# Altium PCB CoreSTM32MP157.PcbDoc
Units mil, origin at the board's own origin, x right, y up, seen from the top; angles counter-clockwise.
Board outline 2263.78 x 1771.65 mil, 2 copper layers (Top Layer, Bottom Layer); 44 components, 97 nets, 1096 pads, 0 vias.
Unrouted connection lines stored in the file: 340.
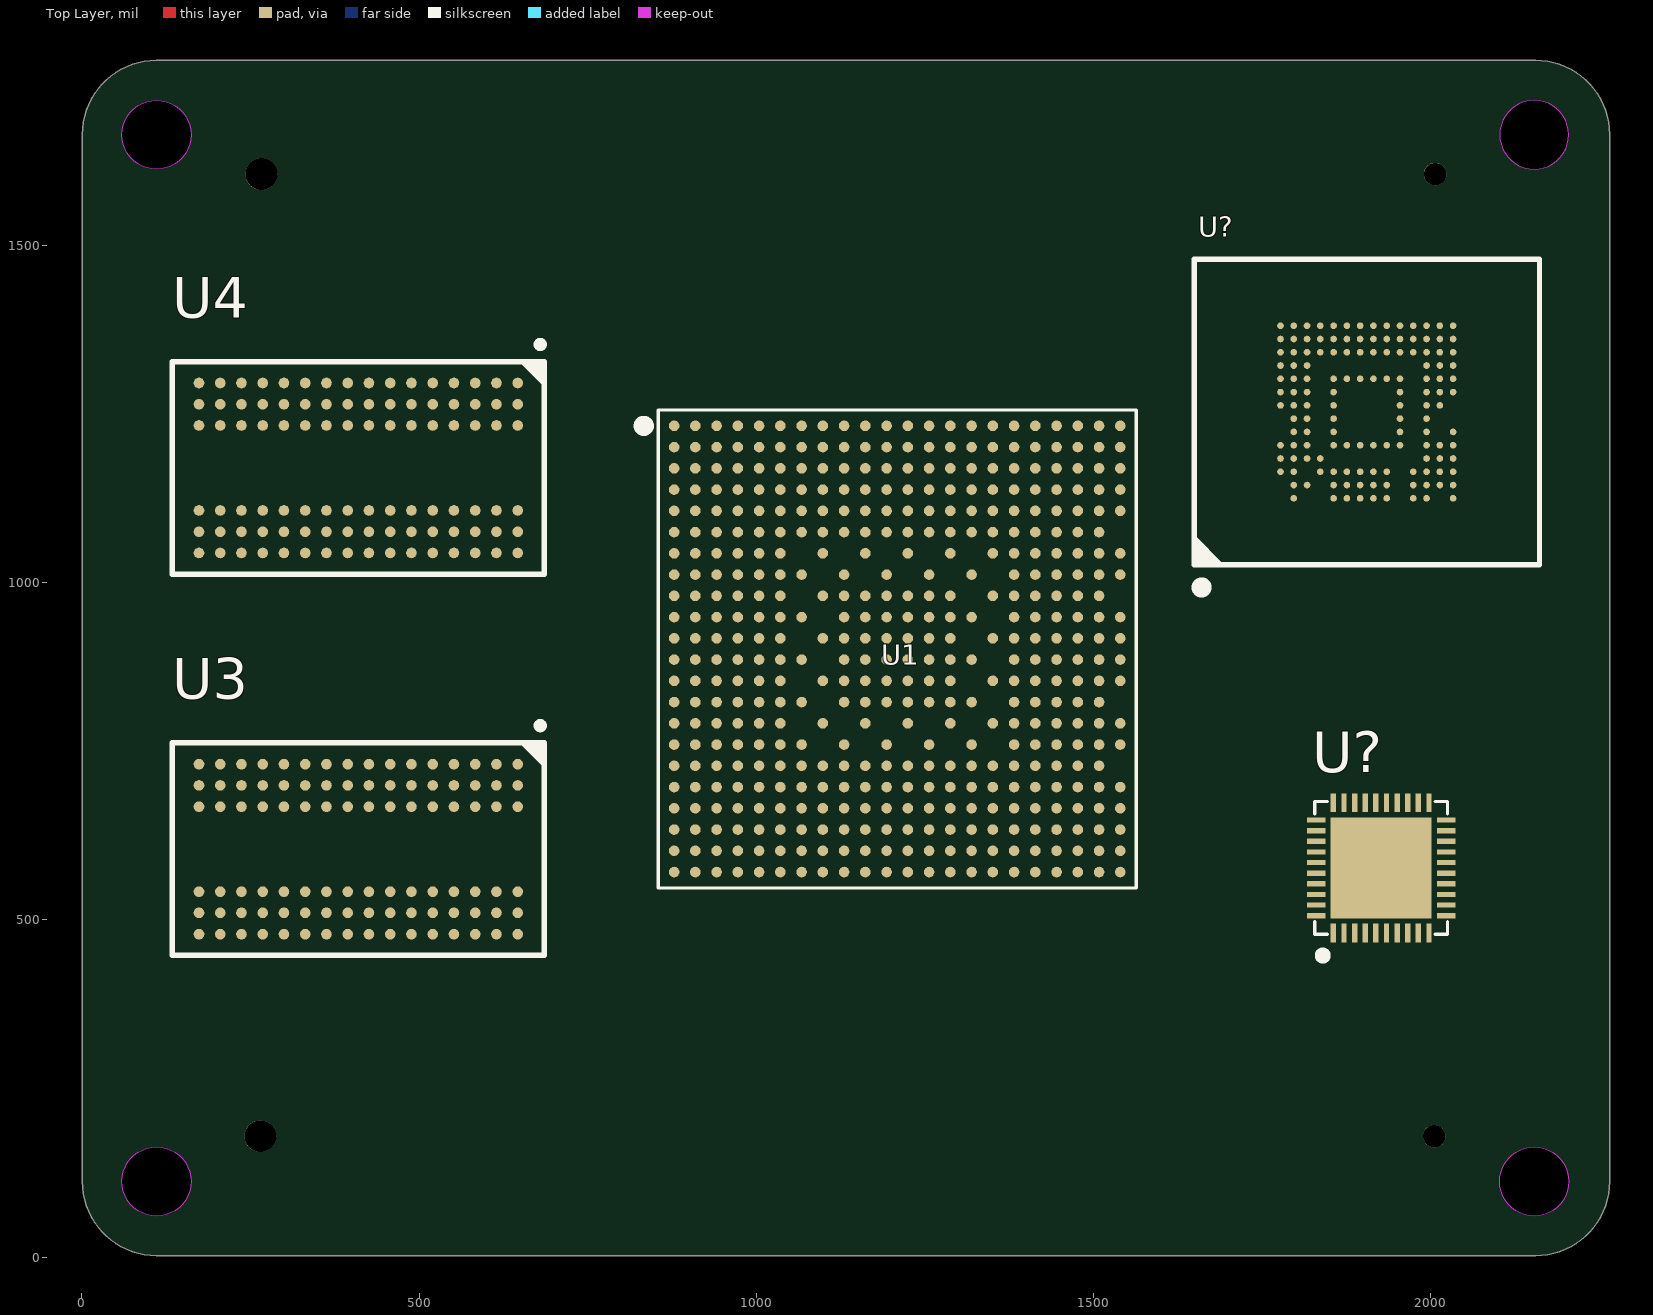
[diagram p0: Top Layer view]
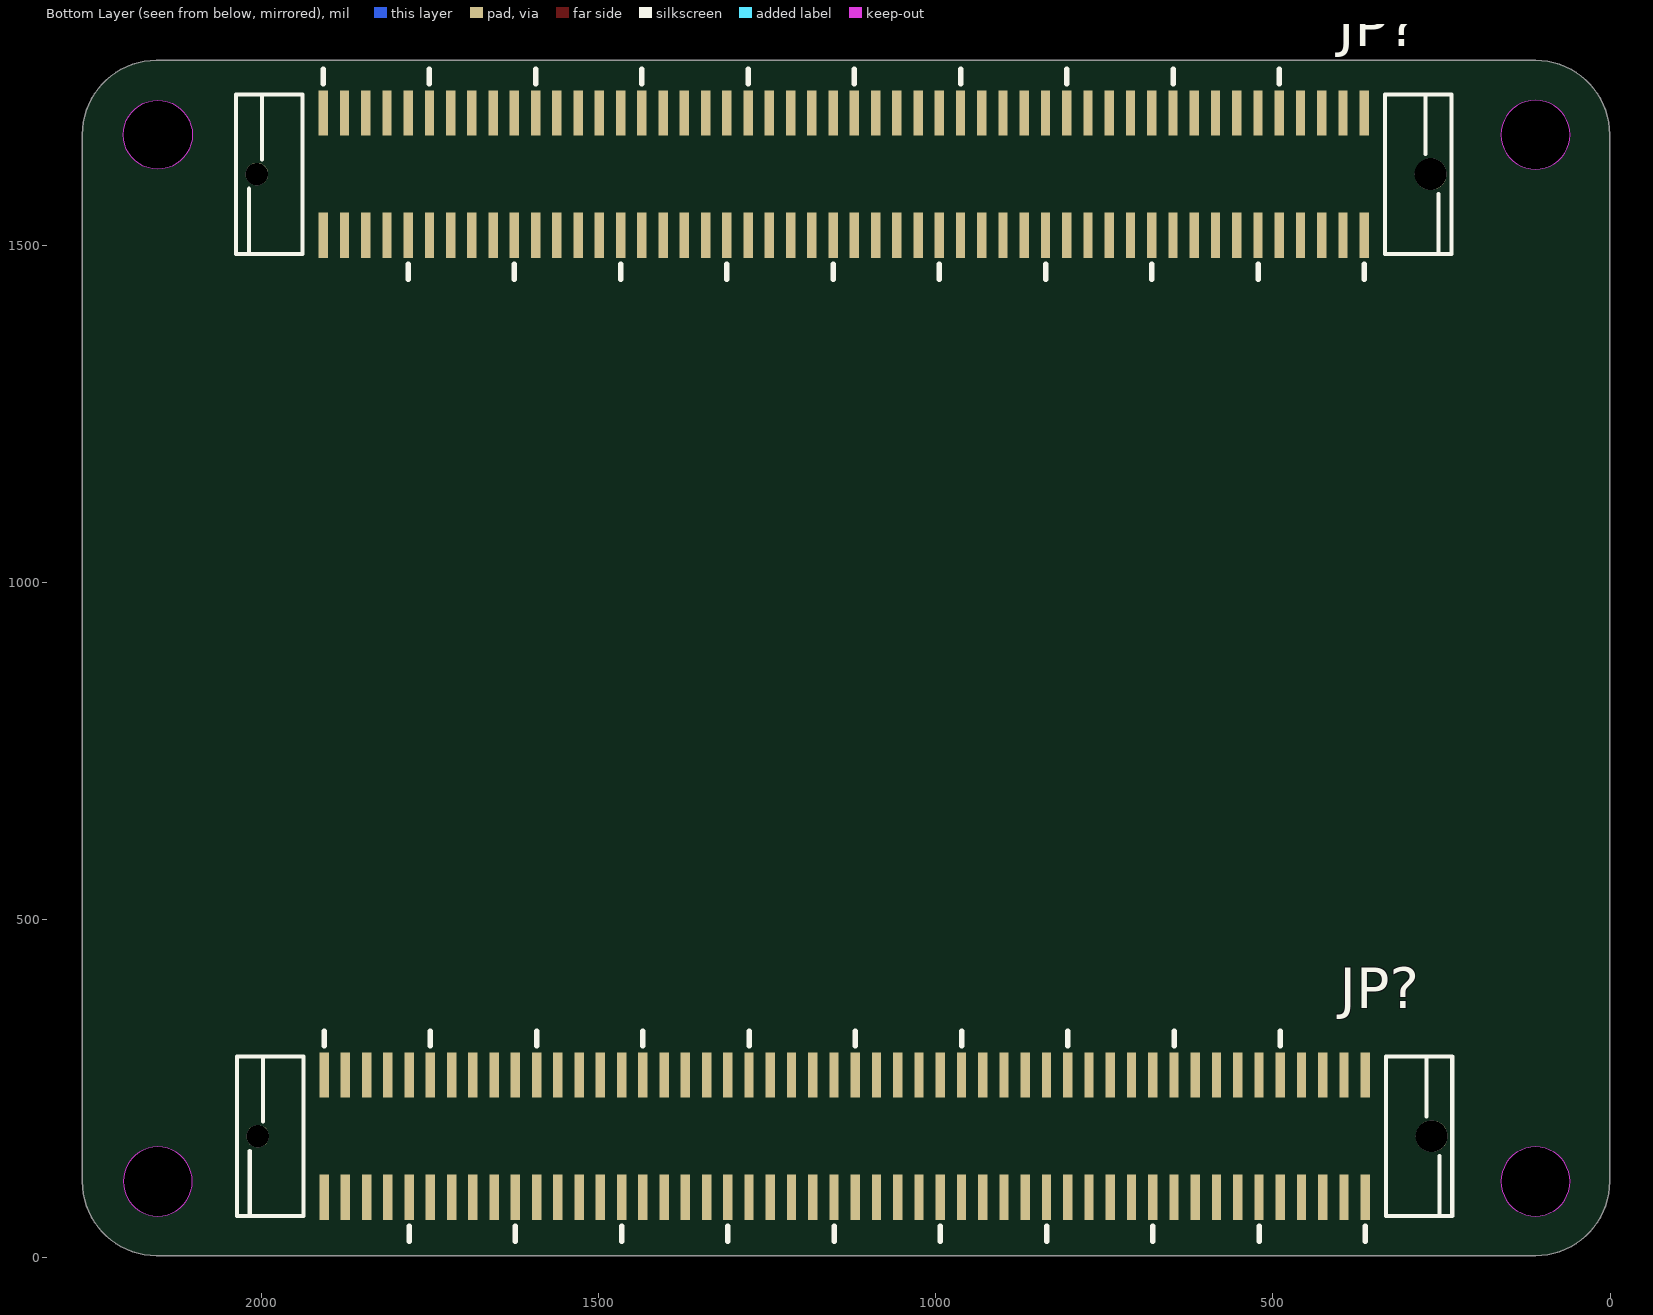
[diagram p1: Bottom Layer view, seen from below]

## Layer stack, top to bottom
Top Solder: solder mask 0.4, Solder Resist, Dk 3.5
Top Layer: signal copper 1.4
Dielectric 1: dielectric 12.6, FR-4, Dk 4.8
Bottom Layer: signal copper 1.4
Bottom Solder: solder mask 0.4, Solder Resist, Dk 3.5

## Board outline
0.97,112.34 0.97,1664.31 cw(c110.81,1664.31) 110.81,1774.15 2154.91,1774.15 cw(c2154.91,1664.31) 2264.75,1664.31 2264.75,112.34 cw(c2154.91,112.34) 2154.91,2.5 110.81,2.5 cw(c110.81,112.34)
cut-out: 2204.12,112.34 cw(c2152.94,112.34) 2152.94,61.16 cw(c2152.94,112.34) 2101.76,112.34 cw(c2152.94,112.34) 2152.94,163.52 cw(c2152.94,112.34)
cut-out: 2152.94,1612.74 ccw(c2152.94,1663.92) 2204.12,1663.92 ccw(c2152.94,1663.92) 2152.94,1715.1 ccw(c2152.94,1663.92) 2101.76,1663.92 ccw(c2152.94,1663.92)
cut-out: 161.99,1663.92 cw(c110.81,1663.92) 110.81,1612.74 cw(c110.81,1663.92) 59.63,1663.92 cw(c110.81,1663.92) 110.81,1715.1 cw(c110.81,1663.92)
cut-out: 161.99,112.34 cw(c110.81,112.34) 110.81,61.16 cw(c110.81,112.34) 59.63,112.34 cw(c110.81,112.34) 110.81,163.52 cw(c110.81,112.34)

## Design rules (kind name [scope] priority, off if disabled: settings)
Clearance [All] p1: gap=10 ignorepadtopadclearanceinfootprint=FALSE except(0: Arc-Hole Track-Hole SMDPad-Hole THPad-Hole Via-Hole Fill-Hole Poly-Hole Region-Hole Text-Hole)
PolygonConnect [All] p1: connectstyle=Relief reliefconductorwidth=10 reliefentries=4 polygonreliefangle="90 Angle" airgapwidth=10
RoutingVias [All] p1: holewidth=28 width=50 viastyle="Through Hole" minholewidth=28 minwidth=50 maxholewidth=28 maxwidth=50
SolderMaskExpansion [All] p1: expansion=4 istentingtop=FALSE
Width [All] p1: maxlimit=10 minlimit=10 preferedwidth=10
30 further rules are at their usual default settings.

## Classes and differential pairs
component class PHY: U?
component class BTB: JP?
component class EMMC: C103 C104 C? R? U?
component class DDR: C45 C46 C47 C48 C49 C50 C51 C52 C53 C54 C55 C56 C57 C58 C59 C60 C61 C62 C63 C64 C65 C66 C67 C68 R14 R15 R18 R27 R30 U3 U4
component class CPU_CORE1: U1

## Components (designator, comment, footprint, x,y, rotation, side; value= is the part's Value field where it differs from the comment)
C45 "100nF" "C 0402" 12780,3580 r90 top
C46 "100nF" "C 0402" 13010,3580 r90 top
C47 "100nF" "C 0402" 12320,3580 r90 top
C48 "100nF" "C 0402" 12550,3580 r90 top
C49 "10uF" "C 0603" 10270,3560 r90 top
C50 "1uF" "C 0402" 10495,3580 r90 top
C51 "1uF" "C 0402" 10730,3580 r90 top
C52 "100nF" "C 0402" 10940,3580 r90 top
C53 "100nF" "C 0402" 11170,3580 r90 top
C54 "100nF" "C 0402" 11400,3580 r90 top
C55 "100nF" "C 0402" 11630,3580 r90 top
C56 "100nF" "C 0402" 11860,3580 r90 top
C57 "100nF" "C 0402" 12090,3580 r90 top
C58 "10uF" "C 0603" 8220,3560 r90 top
C59 "1uF" "C 0402" 8445,3580 r90 top
C60 "1uF" "C 0402" 8675,3580 r90 top
C61 "100nF" "C 0402" 8905,3580 r90 top
C62 "100nF" "C 0402" 9115,3580 r90 top
C63 "100nF" "C 0402" 9345,3580 r90 top
C64 "100nF" "C 0402" 9575,3580 r90 top
C65 "100nF" "C 0402" 9805,3580 r90 top
C66 "100nF" "C 0402" 10035,3580 r90 top
C67 "0.1uF" "C 0402" 7750,3580 r90 top
C68 "0.1uF" "C 0402" 7070,3580 r90 top
C103 "1uF" "C 0603" 7695,3830 r90 top
C103 "10uF" "C 0603" 8535,3830 r90 top
C103 "10uF" "C 0603" 7975,3830 r90 top
C104 "100nF" "C 0402" 8810,3850 r90 top
C104 "100nF" "C 0402" 8250,3850 r90 top
C104 "100nF" "C 0402" 7410,3850 r90 top
C? "10uF" "C 0402" 7090,3865 r0 top
JP? "3710F_2*50" 3710F_2*50 1134.76,179.45 r90 bottom
JP? "3710F_2*50" 3710F_2*50 1136.22,1605.55 r90 bottom
R14 "240R" "R 0402" 13465,3580 r90 top
R15 "240R" "R 0402" 13240,3580 r90 top
R18 "100R" "R 0402" 7530,3580 r90 top
R27 "1K" "R 0402" 7980,3580 r90 top
R30 "1K" "R 0402" 7300,3580 r90 top
R? "10K" "R 0402" 7260,3865 r0 top
U1 "STM32MP175DAA1" LFBGA448 878.07,1232.44 r0 top
U3 "NT5CC256M16EP-EKI" BGA96 410,605 r270 top
U4 "NT5CC256M16EP-EKI" BGA96 410,1170 r270 top
U? "YT8511C/H" "QFN40 5X5_N" 1926.15,577.21 r0 top
U? "KLM8G1GETF-B041" "BGA153  EMMC" 1904.84,1252.95 r90 top

## Footprints (in the part's own frame and the unit in brackets; to place one, negate y for a bottom-side part, rotate by r counter-clockwise, add the part's x,y. Pads: shape width x height; smd on the part's side, far side on the other; paste and mask are expansions set on the pad)
3710F_2*50 [mm]
  round 1.2 hole 1.2 unplated mask+0: 0(0,-22.098)
  round 0.85 hole 0.85 unplated mask+0: 0(0,22.098)
  rect 1.7x0.35 smd: 1(-2.3,19.6) 2(-2.3,18.8) 3(-2.3,18) 4(-2.3,17.2) 5(-2.3,16.4) 6(-2.3,15.6) 7(-2.3,14.8) 8(-2.3,14) 9(-2.3,13.2) 10(-2.3,12.4) 11(-2.3,11.6) 12(-2.3,10.8) 13(-2.3,10) 14(-2.3,9.2) 15(-2.3,8.4) 16(-2.3,7.6) 17(-2.3,6.8) 18(-2.3,6) 19(-2.3,5.2) 20(-2.3,4.4) 21(-2.3,3.6) 22(-2.3,2.8) 23(-2.3,2) 24(-2.3,1.2) 25(-2.3,0.4) 26(-2.3,-0.4) 27(-2.3,-1.2) 28(-2.3,-2) 29(-2.3,-2.8) 30(-2.3,-3.6) 31(-2.3,-4.4) 32(-2.3,-5.2) 33(-2.3,-6) 34(-2.3,-6.8) 35(-2.3,-7.6) 36(-2.3,-8.4) 37(-2.3,-9.2) 38(-2.3,-10) 39(-2.3,-10.8) 40(-2.3,-11.6) 41(-2.3,-12.4) 42(-2.3,-13.2) 43(-2.3,-14) 44(-2.3,-14.8) 45(-2.3,-15.6) 46(-2.3,-16.4) 47(-2.3,-17.2) 48(-2.3,-18) 49(-2.3,-18.8) 50(-2.3,-19.6) 51(2.3,-19.6) 52(2.3,-18.8) 53(2.3,-18) 54(2.3,-17.2) 55(2.3,-16.4) 56(2.3,-15.6) 57(2.3,-14.8) 58(2.3,-14) 59(2.3,-13.2) 60(2.3,-12.4) 61(2.3,-11.6) 62(2.3,-10.8) 63(2.3,-10) 64(2.3,-9.2) 65(2.3,-8.4) 66(2.3,-7.6) 67(2.3,-6.8) 68(2.3,-6) 69(2.3,-5.2) 70(2.3,-4.4) 71(2.3,-3.6) 72(2.3,-2.8) 73(2.3,-2) 74(2.3,-1.2) 75(2.3,-0.4) 76(2.3,0.4) 77(2.3,1.2) 78(2.3,2) 79(2.3,2.8) 80(2.3,3.6) 81(2.3,4.4) 82(2.3,5.2) 83(2.3,6) 84(2.3,6.8) 85(2.3,7.6) 86(2.3,8.4) 87(2.3,9.2) 88(2.3,10) 89(2.3,10.8) 90(2.3,11.6) 91(2.3,12.4) 92(2.3,13.2) 93(2.3,14) 94(2.3,14.8) 95(2.3,15.6) 96(2.3,16.4) 97(2.3,17.2) 98(2.3,18) 99(2.3,18.8) 100(2.3,19.6)
  silkscreen extent -3.95,-22.87 3.95,22.88
BGA96 [mm]
  round 0.4 smd: A1(-3.2,6) A2(-2.4,6) A3(-1.6,6) A7(1.6,6) A8(2.4,6) A9(3.2,6) B1(-3.2,5.2) B2(-2.4,5.2) B3(-1.6,5.2) B7(1.6,5.2) B8(2.4,5.2) B9(3.2,5.2) C1(-3.2,4.4) C2(-2.4,4.4) C3(-1.6,4.4) C7(1.6,4.4) C8(2.4,4.4) C9(3.2,4.4) D1(-3.2,3.6) D2(-2.4,3.6) D3(-1.6,3.6) D7(1.6,3.6) D8(2.4,3.6) D9(3.2,3.6) E1(-3.2,2.8) E2(-2.4,2.8) E3(-1.6,2.8) E7(1.6,2.8) E8(2.4,2.8) E9(3.2,2.8) F1(-3.2,2) F2(-2.4,2) F3(-1.6,2) F7(1.6,2) F8(2.4,2) F9(3.2,2) G1(-3.2,1.2) G2(-2.4,1.2) G3(-1.6,1.2) G7(1.6,1.2) G8(2.4,1.2) G9(3.2,1.2) H1(-3.2,0.4) H2(-2.4,0.4) H3(-1.6,0.4) H7(1.6,0.4) H8(2.4,0.4) H9(3.2,0.4) J1(-3.2,-0.4) J2(-2.4,-0.4) J3(-1.6,-0.4) J7(1.6,-0.4) J8(2.4,-0.4) J9(3.2,-0.4) K1(-3.2,-1.2) K2(-2.4,-1.2) K3(-1.6,-1.2) K7(1.6,-1.2) K8(2.4,-1.2) K9(3.2,-1.2) L1(-3.2,-2) L2(-2.4,-2) L3(-1.6,-2) L7(1.6,-2) L8(2.4,-2) L9(3.2,-2) M1(-3.2,-2.8) M2(-2.4,-2.8) M3(-1.6,-2.8) M7(1.6,-2.8) M8(2.4,-2.8) M9(3.2,-2.8) N1(-3.2,-3.6) N2(-2.4,-3.6) N3(-1.6,-3.6) N7(1.6,-3.6) N8(2.4,-3.6) N9(3.2,-3.6) P1(-3.2,-4.4) P2(-2.4,-4.4) P3(-1.6,-4.4) P7(1.6,-4.4) P8(2.4,-4.4) P9(3.2,-4.4) R1(-3.2,-5.2) R2(-2.4,-5.2) R3(-1.6,-5.2) R7(1.6,-5.2) R8(2.4,-5.2) R9(3.2,-5.2) T1(-3.2,-6) T2(-2.4,-6) T3(-1.6,-6) T7(1.6,-6) T8(2.4,-6) T9(3.2,-6)
  silkscreen extent -4.77,-7 4,7, body extent -4,-7 4,7, height 1.2
"BGA153  EMMC" [mm] "BGA, 153-Leads, Body 13.0x11.5mm,  Pitch 0.50mm"
  round 0.25 smd: A3(-2.25,3.25) A4(-1.75,3.25) A5(-1.25,3.25) A8(0.25,3.25) A9(0.75,3.25) A10(1.25,3.25) A11(1.75,3.25) A12(2.25,3.25) A13(2.75,3.25) A14(3.25,3.25) B1(-3.25,2.75) B2(-2.75,2.75) B3(-2.25,2.75) B4(-1.75,2.75) B5(-1.25,2.75) B6(-0.75,2.75) B7(-0.25,2.75) B8(0.25,2.75) B9(0.75,2.75) B10(1.25,2.75) B11(1.75,2.75) B12(2.25,2.75) B13(2.75,2.75) B14(3.25,2.75) C2(-2.75,2.25) C4(-1.75,2.25) C5(-1.25,2.25) C6(-0.75,2.25) C7(-0.25,2.25) C8(0.25,2.25) C9(0.75,2.25) C10(1.25,2.25) C11(1.75,2.25) C12(2.25,2.25) C13(2.75,2.25) C14(3.25,2.25) D3(-2.25,1.75) D4(-1.75,1.75) D12(2.25,1.75) D13(2.75,1.75) D14(3.25,1.75) E1(-3.25,1.25) E2(-2.75,1.25) E3(-2.25,1.25) E5(-1.25,1.25) E6(-0.75,1.25) E7(-0.25,1.25) E8(0.25,1.25) E9(0.75,1.25) E10(1.25,1.25) E12(2.25,1.25) E13(2.75,1.25) E14(3.25,1.25) F1(-3.25,0.75) F2(-2.75,0.75) F3(-2.25,0.75) F5(-1.25,0.75) F10(1.25,0.75) F12(2.25,0.75) F13(2.75,0.75) F14(3.25,0.75) G1(-3.25,0.25) G2(-2.75,0.25) G3(-2.25,0.25) G5(-1.25,0.25) G10(1.25,0.25) G12(2.25,0.25) G13(2.75,0.25) G14(3.25,0.25) H1(-3.25,-0.25) H2(-2.75,-0.25) H3(-2.25,-0.25) H5(-1.25,-0.25) H10(1.25,-0.25) H12(2.25,-0.25) H13(2.75,-0.25) H14(3.25,-0.25) J1(-3.25,-0.75) J2(-2.75,-0.75) J3(-2.25,-0.75) J5(-1.25,-0.75) J10(1.25,-0.75) J12(2.25,-0.75) J13(2.75,-0.75) J14(3.25,-0.75) K5(-1.25,-1.25) K6(-0.75,-1.25) K7(-0.25,-1.25) K8(0.25,-1.25) K9(0.75,-1.25) K10(1.25,-1.25) K12(2.25,-1.25) K13(2.75,-1.25) K14(3.25,-1.25) L1(-3.25,-1.75) L2(-2.75,-1.75) L3(-2.25,-1.75) L12(2.25,-1.75) L13(2.75,-1.75) L14(3.25,-1.75) M1(-3.25,-2.25) M2(-2.75,-2.25) M3(-2.25,-2.25) M4(-1.75,-2.25) M5(-1.25,-2.25) M6(-0.75,-2.25) M7(-0.25,-2.25) M8(0.25,-2.25) M9(0.75,-2.25) M10(1.25,-2.25) M11(1.75,-2.25) M12(2.25,-2.25) M13(2.75,-2.25) M14(3.25,-2.25) N2(-2.75,-2.75) N3(-2.25,-2.75) N4(-1.75,-2.75) N5(-1.25,-2.75) N8(0.25,-2.75) N9(0.75,-2.75) N10(1.25,-2.75) N11(1.75,-2.75) N12(2.25,-2.75) N13(2.75,-2.75) N14(3.25,-2.75) P1(-3.25,-3.25) P2(-2.75,-3.25) P3(-2.25,-3.25) P4(-1.75,-3.25) P5(-1.25,-3.25) P6(-0.75,-3.25) P9(0.75,-3.25) P10(1.25,-3.25) P11(1.75,-3.25) P12(2.25,-3.25) P13(2.75,-3.25) P14(3.25,-3.25)
  silkscreen extent -6.73,-6.5 5.75,6.5, body extent -5.74,-6.5 5.76,6.5, height 0.73
"C 0402" [mil] "无极性贴片电容"
  rect 20x23.62 smd mask+2: 1(-19,0) 2(19,0)
  silkscreen extent -33,-16 33,16, body extent -20,-10 20,10, height 20
"C 0603" [mil] "无极性贴片电容"
  rect 30x30 smd: 1(-28,0) 2(28.5,-0.06)
  silkscreen extent -48,-20 49,20, body extent -31,-16 31,16, height 32
LFBGA448 [mm]
  round 0.4 smd mask+0.05: A1(0,0) A2(0.8,0) A3(1.6,0) A4(2.4,0) A5(3.2,0) A6(4,0) A7(4.8,0) A8(5.6,0) A9(6.4,0) A10(7.2,0) A11(8,0) A12(8.8,0) A13(9.6,0) A14(10.4,0) A15(11.2,0) A16(12,0) A17(12.8,0) A18(13.6,0) A19(14.4,0) A20(15.2,0) A21(16,0) A22(16.8,0) AA1(0,-16) AA2(0.8,-16) AA3(1.6,-16) AA4(2.4,-16) AA5(3.2,-16) AA6(4,-16) AA7(4.8,-16) AA8(5.6,-16) AA9(6.4,-16) AA10(7.2,-16) AA11(8,-16) AA12(8.8,-16) AA13(9.6,-16) AA14(10.4,-16) AA15(11.2,-16) AA16(12,-16) AA17(12.8,-16) AA18(13.6,-16) AA19(14.4,-16) AA20(15.2,-16) AA21(16,-16) AA22(16.8,-16) AB1(0,-16.8) AB2(0.8,-16.8) AB3(1.6,-16.8) AB4(2.4,-16.8) AB5(3.2,-16.8) AB6(4,-16.8) AB7(4.8,-16.8) AB8(5.6,-16.8) AB9(6.4,-16.8) AB10(7.2,-16.8) AB11(8,-16.8) AB12(8.8,-16.8) AB13(9.6,-16.8) AB14(10.4,-16.8) AB15(11.2,-16.8) AB16(12,-16.8) AB17(12.8,-16.8) AB18(13.6,-16.8) AB19(14.4,-16.8) AB20(15.2,-16.8) AB21(16,-16.8) AB22(16.8,-16.8) B1(0,-0.8) B2(0.8,-0.8) B3(1.6,-0.8) B4(2.4,-0.8) B5(3.2,-0.8) B6(4,-0.8) B7(4.8,-0.8) B8(5.6,-0.8) B9(6.4,-0.8) B10(7.2,-0.8) B11(8,-0.8) B12(8.8,-0.8) B13(9.6,-0.8) B14(10.4,-0.8) B15(11.2,-0.8) B16(12,-0.8) B17(12.8,-0.8) B18(13.6,-0.8) B19(14.4,-0.8) B20(15.2,-0.8) B21(16,-0.8) B22(16.8,-0.8) C1(0,-1.6) C2(0.8,-1.6) C3(1.6,-1.6) C4(2.4,-1.6) C5(3.2,-1.6) C6(4,-1.6) C7(4.8,-1.6) C8(5.6,-1.6) C9(6.4,-1.6) C10(7.2,-1.6) C11(8,-1.6) C12(8.8,-1.6) C13(9.6,-1.6) C14(10.4,-1.6) C15(11.2,-1.6) C16(12,-1.6) C17(12.8,-1.6) C18(13.6,-1.6) C19(14.4,-1.6) C20(15.2,-1.6) C21(16,-1.6) C22(16.8,-1.6) D1(0,-2.4) D2(0.8,-2.4) D3(1.6,-2.4) D4(2.4,-2.4) D5(3.2,-2.4) D6(4,-2.4) D7(4.8,-2.4) D8(5.6,-2.4) D9(6.4,-2.4) D10(7.2,-2.4) D11(8,-2.4) D12(8.8,-2.4) D13(9.6,-2.4) D14(10.4,-2.4) D15(11.2,-2.4) D16(12,-2.4) D17(12.8,-2.4) D18(13.6,-2.4) D19(14.4,-2.4) D20(15.2,-2.4) D21(16,-2.4) D22(16.8,-2.4) E1(0,-3.2) E2(0.8,-3.2) E3(1.6,-3.2) E4(2.4,-3.2) E5(3.2,-3.2) E6(4,-3.2) E7(4.8,-3.2) E8(5.6,-3.2) E9(6.4,-3.2) E10(7.2,-3.2) E11(8,-3.2) E12(8.8,-3.2) E13(9.6,-3.2) E14(10.4,-3.2) E15(11.2,-3.2) E16(12,-3.2) E17(12.8,-3.2) E18(13.6,-3.2) E19(14.4,-3.2) E20(15.2,-3.2) E21(16,-3.2) E22(16.8,-3.2) F1(0,-4) F2(0.8,-4) F3(1.6,-4) F4(2.4,-4) F5(3.2,-4) F6(4,-4) F7(4.8,-4) F8(5.6,-4) F9(6.4,-4) F10(7.2,-4) F11(8,-4) F12(8.8,-4) F13(9.6,-4) F14(10.4,-4) F15(11.2,-4) F16(12,-4) F17(12.8,-4) F18(13.6,-4) F19(14.4,-4) F20(15.2,-4) F21(16,-4) G1(0,-4.8) G2(0.8,-4.8) G3(1.6,-4.8) G4(2.4,-4.8) G5(3.2,-4.8) G6(4,-4.8) G8(5.6,-4.8) G10(7.2,-4.8) G12(8.8,-4.8) G14(10.4,-4.8) G16(12,-4.8) G17(12.8,-4.8) G18(13.6,-4.8) G19(14.4,-4.8) G20(15.2,-4.8) G21(16,-4.8) G22(16.8,-4.8) H1(0,-5.6) H2(0.8,-5.6) H3(1.6,-5.6) H4(2.4,-5.6) H5(3.2,-5.6) H6(4,-5.6) H7(4.8,-5.6) H9(6.4,-5.6) H11(8,-5.6) H13(9.6,-5.6) H15(11.2,-5.6) H17(12.8,-5.6) H18(13.6,-5.6) H19(14.4,-5.6) H20(15.2,-5.6) H21(16,-5.6) H22(16.8,-5.6) J1(0,-6.4) J2(0.8,-6.4) J3(1.6,-6.4) J4(2.4,-6.4) J5(3.2,-6.4) J6(4,-6.4) J8(5.6,-6.4) J9(6.4,-6.4) J10(7.2,-6.4) J11(8,-6.4) J12(8.8,-6.4) J13(9.6,-6.4) J14(10.4,-6.4) J16(12,-6.4) J17(12.8,-6.4) J18(13.6,-6.4) J19(14.4,-6.4) J20(15.2,-6.4) J21(16,-6.4) K1(0,-7.2) K2(0.8,-7.2) K3(1.6,-7.2) K4(2.4,-7.2) K5(3.2,-7.2) K6(4,-7.2) K7(4.8,-7.2) K9(6.4,-7.2) K10(7.2,-7.2) K11(8,-7.2) K12(8.8,-7.2) K13(9.6,-7.2) K14(10.4,-7.2) K15(11.2,-7.2) K17(12.8,-7.2) K18(13.6,-7.2) K19(14.4,-7.2) K20(15.2,-7.2) K21(16,-7.2) K22(16.8,-7.2) L1(0,-8) L2(0.8,-8) L3(1.6,-8) L4(2.4,-8) L5(3.2,-8) L6(4,-8) L8(5.6,-8) L9(6.4,-8) L10(7.2,-8) L11(8,-8) L12(8.8,-8) L13(9.6,-8) L14(10.4,-8) L16(12,-8) L17(12.8,-8) L18(13.6,-8) L19(14.4,-8) L20(15.2,-8) L21(16,-8) L22(16.8,-8) M1(0,-8.8) M2(0.8,-8.8) M3(1.6,-8.8) M4(2.4,-8.8) M5(3.2,-8.8) M6(4,-8.8) M7(4.8,-8.8) M9(6.4,-8.8) M10(7.2,-8.8) M11(8,-8.8) M12(8.8,-8.8) M13(9.6,-8.8) M14(10.4,-8.8) M15(11.2,-8.8) M17(12.8,-8.8) M18(13.6,-8.8) M19(14.4,-8.8) M20(15.2,-8.8) M21(16,-8.8) M22(16.8,-8.8) N1(0,-9.6) N2(0.8,-9.6) N3(1.6,-9.6) N4(2.4,-9.6) N5(3.2,-9.6) N6(4,-9.6) N8(5.6,-9.6) N9(6.4,-9.6) N10(7.2,-9.6) N11(8,-9.6) N12(8.8,-9.6) N13(9.6,-9.6) N14(10.4,-9.6) N16(12,-9.6) N17(12.8,-9.6) N18(13.6,-9.6) N19(14.4,-9.6) N20(15.2,-9.6) N21(16,-9.6) N22(16.8,-9.6) P1(0,-10.4) P2(0.8,-10.4) P3(1.6,-10.4) P4(2.4,-10.4) P5(3.2,-10.4) P6(4,-10.4) P7(4.8,-10.4) P9(6.4,-10.4) P10(7.2,-10.4) P11(8,-10.4) P12(8.8,-10.4) P13(9.6,-10.4) P14(10.4,-10.4) P15(11.2,-10.4) P17(12.8,-10.4) P18(13.6,-10.4) P19(14.4,-10.4) P20(15.2,-10.4) P21(16,-10.4) R1(0,-11.2) R2(0.8,-11.2) R3(1.6,-11.2) R4(2.4,-11.2) R5(3.2,-11.2) R6(4,-11.2) R8(5.6,-11.2) R10(7.2,-11.2) R12(8.8,-11.2) R14(10.4,-11.2) R16(12,-11.2) R17(12.8,-11.2) R18(13.6,-11.2) R19(14.4,-11.2) R20(15.2,-11.2) R21(16,-11.2) R22(16.8,-11.2) T1(0,-12) T2(0.8,-12) T3(1.6,-12) T4(2.4,-12) T5(3.2,-12) T6(4,-12) T7(4.8,-12) T9(6.4,-12) T11(8,-12) T13(9.6,-12) T15(11.2,-12) T17(12.8,-12) T18(13.6,-12) T19(14.4,-12) T20(15.2,-12) T21(16,-12) T22(16.8,-12) U1(0,-12.8) U2(0.8,-12.8) U3(1.6,-12.8) U4(2.4,-12.8) U5(3.2,-12.8) U6(4,-12.8) U7(4.8,-12.8) U8(5.6,-12.8) U9(6.4,-12.8) U10(7.2,-12.8) U11(8,-12.8) U12(8.8,-12.8) U13(9.6,-12.8) U14(10.4,-12.8) U15(11.2,-12.8) U16(12,-12.8) U17(12.8,-12.8) U18(13.6,-12.8) U19(14.4,-12.8) U20(15.2,-12.8) U21(16,-12.8) V1(0,-13.6) V2(0.8,-13.6) V3(1.6,-13.6) V4(2.4,-13.6) V5(3.2,-13.6) V6(4,-13.6) V7(4.8,-13.6) V8(5.6,-13.6) V9(6.4,-13.6) V10(7.2,-13.6) V11(8,-13.6) V12(8.8,-13.6) V13(9.6,-13.6) V14(10.4,-13.6) V15(11.2,-13.6) V16(12,-13.6) V17(12.8,-13.6) V18(13.6,-13.6) V19(14.4,-13.6) V20(15.2,-13.6) V21(16,-13.6) V22(16.8,-13.6) W1(0,-14.4) W2(0.8,-14.4) W3(1.6,-14.4) W4(2.4,-14.4) W5(3.2,-14.4) W6(4,-14.4) W7(4.8,-14.4) W8(5.6,-14.4) W9(6.4,-14.4) W10(7.2,-14.4) W11(8,-14.4) W12(8.8,-14.4) W13(9.6,-14.4) W14(10.4,-14.4) W15(11.2,-14.4) W16(12,-14.4) W17(12.8,-14.4) W18(13.6,-14.4) W19(14.4,-14.4) W20(15.2,-14.4) W21(16,-14.4) W22(16.8,-14.4) Y1(0,-15.2) Y2(0.8,-15.2) Y3(1.6,-15.2) Y4(2.4,-15.2) Y5(3.2,-15.2) Y6(4,-15.2) Y7(4.8,-15.2) Y8(5.6,-15.2) Y9(6.4,-15.2) Y10(7.2,-15.2) Y11(8,-15.2) Y12(8.8,-15.2) Y13(9.6,-15.2) Y14(10.4,-15.2) Y15(11.2,-15.2) Y16(12,-15.2) Y17(12.8,-15.2) Y18(13.6,-15.2) Y19(14.4,-15.2) Y20(15.2,-15.2) Y21(16,-15.2) Y22(16.8,-15.2)
  silkscreen extent -1.32,-17.4 17.4,0.6
"QFN40 5X5_N" [mm]
  rect 0.2x0.7 smd mask+0.05: 1(-1.8,-2.45) 2(-1.4,-2.45) 3(-1,-2.45) 4(-0.6,-2.45) 5(-0.2,-2.45) 6(0.2,-2.45) 7(0.6,-2.45) 8(1,-2.45) 9(1.4,-2.45) 10(1.8,-2.45) 21(1.8,2.45) 22(1.4,2.45) 23(1,2.45) 24(0.6,2.45) 25(0.2,2.45) 26(-0.2,2.45) 27(-0.6,2.45) 28(-1,2.45) 29(-1.4,2.45) 30(-1.8,2.45)
  rect 0.7x0.2 smd mask+0.05: 11(2.45,-1.8) 12(2.45,-1.4) 13(2.45,-1) 14(2.45,-0.6) 15(2.45,-0.2) 16(2.45,0.2) 17(2.45,0.6) 18(2.45,1) 19(2.45,1.4) 20(2.45,1.8) 31(-2.45,1.8) 32(-2.45,1.4) 33(-2.45,1) 34(-2.45,0.6) 35(-2.45,0.2) 36(-2.45,-0.2) 37(-2.45,-0.6) 38(-2.45,-1) 39(-2.45,-1.4) 40(-2.45,-1.8)
  rect 3.8x3.8 smd mask+0.05: 41(0,0)
  silkscreen extent -2.5,-3.4 2.5,2.5, body extent -2.5,-2.5 2.5,2.5, height 0.74
"R 0402" [mil] "1/16W贴片电阻"
  rect 20x23.62 smd mask+2: 1(-19,0) 2(19,0)
  silkscreen extent -33,-16 33,16, body extent -20,-10 20,10, height 12

## Part data
C45 C46 C47 C48 C49 C50 C51 C52 C53 C54 C55 C56 C57 C58 C59 C60 C61 C62 C63 C64 C65 C66 C67 C68 C103 C103 C103 C104 C104 C104 C?: library part C, "无极性贴片电容", BOM名称=无极性贴片电容, 学习资源=www.openedv.com, 版权归属=正点原子
JP? JP?: library part "Header 50x2", "50P*2接插件"
R14 R15 R18 R27 R30 R?: library part R, "贴片电阻", BOM名称=贴片电阻, 学习资源=www.openedv.com, 版权归属=正点原子
U1: library part STM32MP175AAA3
U3 U4: library part MT41K256M16TW
U?: "千兆以太网PHY"
U?: "8GB EMMC存储芯片"

## Nets (pads, with @x,y where several pads share a name; then routed paths per layer and width w, separated by ;. In a path a pad name is that pad's centre, name@x,y a point inside that pad or via, vN(x,y) a via of type N, cw(c..) or ccw(c..) an arc to the next point about the centre after c; other vN are vias at no path point)
DDR_A0: U3.N3 U4.N3
DDR_A1: U3.P7 U4.P7
DDR_A2: U3.P3 U4.P3
DDR_A3: U3.N2 U4.N2
DDR_A4: U3.P8 U4.P8
DDR_A5: U3.P2 U4.P2
DDR_A6: U3.R8 U4.R8
DDR_A7: U3.R2 U4.R2
DDR_A8: U3.T8 U4.T8
DDR_A9: U3.R3 U4.R3
DDR_A10: U3.L7 U4.L7
DDR_A11: U3.R7 U4.R7
DDR_A12: U3.N7 U4.N7
DDR_A13: U3.T3 U4.T3
DDR_A14: U3.T7 U4.T7
DDR_BA0: U3.M2 U4.M2
DDR_BA1: U3.N8 U4.N8
DDR_BA2: U3.M3 U4.M3
DDR_CAS: U3.K3 U4.K3
DDR_CKE: U3.K9 U4.K9
DDR_CKN: R18.1 U3.K7 U4.K7
DDR_CKP: R18.2 U3.J7 U4.J7
DDR_CS: U3.L2 U4.L2
DDR_DM0: U4.E7
DDR_DM1: U4.D3
DDR_DM2: U3.E7
DDR_DM3: U3.D3
DDR_DQ0: U4.E3
DDR_DQ1: U4.G2
DDR_DQ2: U4.F2
DDR_DQ3: U4.H3
DDR_DQ4: U4.H8
DDR_DQ5: U4.F8
DDR_DQ6: U4.F7
DDR_DQ7: U4.H7
DDR_DQ8: U4.C3
DDR_DQ9: U4.A2
DDR_DQ10: U4.A3
DDR_DQ11: U4.C2
DDR_DQ12: U4.D7
DDR_DQ13: U4.B8
DDR_DQ14: U4.A7
DDR_DQ15: U4.C8
DDR_DQ16: U3.F2
DDR_DQ17: U3.G2
DDR_DQ18: U3.E3
DDR_DQ19: U3.H3
DDR_DQ20: U3.F8
DDR_DQ21: U3.H8
DDR_DQ22: U3.F7
DDR_DQ23: U3.H7
DDR_DQ24: U3.C2
DDR_DQ25: U3.D7
DDR_DQ26: U3.A3
DDR_DQ27: U3.A7
DDR_DQ28: U3.B8
DDR_DQ29: U3.C8
DDR_DQ30: U3.A2
DDR_DQ31: U3.C3
DDR_DQS0N: U4.G3
DDR_DQS0P: U4.F3
DDR_DQS1N: U4.B7
DDR_DQS1P: U4.C7
DDR_DQS2N: U3.G3
DDR_DQS2P: U3.F3
DDR_DQS3N: U3.B7
DDR_DQS3P: U3.C7
DDR_ODT: U3.K1 U4.K1
DDR_RAS: U3.J3 U4.J3
DDR_RST: U3.T2 U4.T2
DDR_WE: U3.L3 U4.L3
EMMC_CLK: U?.M6
EMMC_CMD: U?.M5
EMMC_D0: U?.A3
EMMC_D1: U?.A4
EMMC_D2: U?.A5
EMMC_D3: U?.B2
EMMC_D4: U?.B3
EMMC_D5: U?.B4
EMMC_D6: U?.B5
EMMC_D7: U?.B6
GND: C45.1 C46.1 C47.1 C48.1 C49.1 C50.1 C51.1 C52.1 C53.1 C54.1 C55.1 C56.1 C57.1 C58.1 C59.1 C60.1 C61.1 C62.1 C63.1 C64.1 C65.1 C66.1 C68.1 C103.1 C104.1 C?.1 R14.2 R15.2 R30.1 U3.A9 U3.B1 U3.B3 U3.B9 U3.D1 U3.D8 U3.E1 U3.E2 U3.E8 U3.F9 U3.G1 U3.G8 U3.G9 U3.J2 U3.J8 U3.M1 U3.M9 U3.P1 U3.P9 U3.T1 U3.T9 U4.A9 U4.B1 U4.B3 U4.B9 U4.D1 U4.D8 U4.E1 U4.E2 U4.E8 U4.F9 U4.G1 U4.G8 U4.G9 U4.J2 U4.J8 U4.M1 U4.M9 U4.P1 U4.P9 U4.T1 U4.T9 U?.C4 U?.E7 U?.G5 U?.H10 U?.K8 U?.N2 U?.N5 U?.P4 U?.P6
NetC103_2: C103.2@7695.06,3858.5 C104.2@7410,3869 U?.C2
NetR14_1: R14.1 U3.L8
NetR15_1: R15.1 U4.L8
NetU1_A1: U1.A1 U1.A19 U1.A22 U1.B2 U1.B19 U1.C3 U1.C8 U1.C11 U1.C19 U1.C20 U1.D4 U1.E5 U1.E19 U1.F6 U1.F7 U1.F8 U1.F16 U1.F20 U1.G4 U1.G6 U1.G8 U1.G10 U1.G12 U1.G14 U1.G17 U1.H7 U1.J9 U1.J11 U1.J13 U1.J17 U1.J20 U1.K3 U1.K7 U1.K10 U1.K12 U1.K14 U1.L9 U1.L11 U1.L13 U1.L17 U1.L19
NetU1_A18: U1.A18 U1.B18
NetU1_AA4: U1.AA4 U1.AA18 U1.AB1 U1.AB18 U1.AB22 U1.L20 U1.M7 U1.M10 U1.M12 U1.M14 U1.N9 U1.N11 U1.N13 U1.N17 U1.P3 U1.P7 U1.P10 U1.P12 U1.P14 U1.P20 U1.R8 U1.R17 U1.T7 U1.T9 U1.T11 U1.T19 U1.U7 U1.U13 U1.U15 U1.U17 U1.U20 U1.V5 U1.V16 U1.V18 U1.V19 U1.W17 U1.W19 U1.Y3 U1.Y7 U1.Y10 U1.Y18 U1.Y20
NetU1_AA13: U1.AA13 U1.AA16 U1.C14 U1.C15 U1.C16 U1.C17 U1.C18 U1.D19 U1.M5 U1.P5 U1.Y13 U1.Y14 U1.Y15
NetU1_AB13: U1.AB13 U1.AB16
NetU1_E18: U1.E18 U1.F17 U1.G16 U1.H17 U1.J16 U1.K17 U1.L16 U1.M17 U1.N16 U1.P17 U1.R16 U1.T17 U1.U16 U1.V17 U1.W18 U1.Y19
NetU1_H9: U1.H9 U1.H11 U1.H13 U1.H15 U1.J8 U1.J10 U1.J12 U1.J14 U1.K9 U1.K11 U1.K13 U1.K15 U1.L8 U1.L10 U1.L12 U1.L14 U1.M11 U1.M13 U1.M15 U1.N12 U1.N14 U1.P13 U1.P15 U1.R14 U1.T15
NetU1_M9: U1.M9 U1.N8 U1.N10 U1.P9 U1.P11 U1.R10 U1.R12 U1.T13 U1.U12 U1.U14
RESET: C?.2 R?.2 U?.K5
VCC_3.3V: C103.2@7975.06,3858.5 C103.2@8535.06,3858.5 C104.2@8250,3869 C104.2@8810,3869 R?.1 U?.C6 U?.E6 U?.F5 U?.J10 U?.K9 U?.M4 U?.N4 U?.P3 U?.P5
VCC_DDR_1.35V: C49.2 C50.2 C51.2 C52.2 C53.2 C54.2 C55.2 C56.2 C57.2 C58.2 C59.2 C60.2 C61.2 C62.2 C63.2 C64.2 C65.2 C66.2 C67.2 R27.2 U3.A1 U3.A8 U3.B2 U3.C1 U3.C9 U3.D2 U3.D9 U3.E9 U3.F1 U3.G7 U3.H2 U3.H9 U3.K2 U3.K8 U3.N1 U3.N9 U3.R1 U3.R9 U4.A1 U4.A8 U4.B2 U4.C1 U4.C9 U4.D2 U4.D9 U4.E9 U4.F1 U4.G7 U4.H2 U4.H9 U4.K2 U4.K8 U4.N1 U4.N9 U4.R1 U4.R9
VCC_DDR_VREF: C45.2 C46.2 C47.2 C48.2 C67.1 C68.2 R27.1 R30.2 U3.H1 U3.M8 U4.H1 U4.M8
pads on no net: JP?.0 JP?.1 JP?.2 JP?.3 JP?.4 JP?.5 JP?.6 JP?.7 JP?.8 JP?.9 JP?.10 JP?.11 JP?.12 JP?.13 JP?.14 JP?.15 JP?.16 JP?.17 JP?.18 JP?.19 JP?.20 JP?.21 JP?.22 JP?.23 JP?.24 JP?.25 JP?.26 JP?.27 JP?.28 JP?.29 JP?.30 JP?.31 JP?.32 JP?.33 JP?.34 JP?.35 JP?.36 JP?.37 JP?.38 JP?.39 JP?.40 JP?.41 JP?.42 JP?.43 JP?.44 JP?.45 JP?.46 JP?.47 JP?.48 JP?.49 JP?.50 JP?.51 JP?.52 JP?.53 JP?.54 JP?.55 JP?.56 JP?.57 JP?.58 JP?.59 JP?.60 JP?.61 JP?.62 JP?.63 JP?.64 JP?.65 JP?.66 JP?.67 JP?.68 JP?.69 JP?.70 JP?.71 JP?.72 JP?.73 JP?.74 JP?.75 JP?.76 JP?.77 JP?.78 JP?.79 JP?.80 JP?.81 JP?.82 JP?.83 JP?.84 JP?.85 JP?.86 JP?.87 JP?.88 JP?.89 JP?.90 JP?.91 JP?.92 JP?.93 JP?.94 JP?.95 JP?.96 JP?.97 JP?.98 JP?.99 JP?.100 U1.A2 U1.A3 U1.A4 U1.A5 U1.A6 U1.A7 U1.A8 U1.A9 U1.A10 U1.A11 U1.A12 U1.A13 U1.A14 U1.A15 U1.A16 U1.A17 U1.A20 U1.A21 U1.AA1 U1.AA2 U1.AA3 U1.AA5 U1.AA6 U1.AA7 U1.AA8 U1.AA9 U1.AA10 U1.AA11 U1.AA12 U1.AA14 U1.AA15 U1.AA17 U1.AA19 U1.AA20 U1.AA21 U1.AA22 U1.AB2 U1.AB3 U1.AB4 U1.AB5 U1.AB6 U1.AB7 U1.AB8 U1.AB9 U1.AB10 U1.AB11 U1.AB12 U1.AB14 U1.AB15 U1.AB17 U1.AB19 U1.AB20 U1.AB21 U1.B1 U1.B3 U1.B4 U1.B5 U1.B6 U1.B7 U1.B8 U1.B9 U1.B10 U1.B11 U1.B12 U1.B13 U1.B14 U1.B15 U1.B16 U1.B17 U1.B20 U1.B21 U1.B22 U1.C1 U1.C2 U1.C4 U1.C5 U1.C6 U1.C7 U1.C9 U1.C10 U1.C12 U1.C13 U1.C21 U1.C22 U1.D1 U1.D2 U1.D3 U1.D5 U1.D6 U1.D7 U1.D8 U1.D9 U1.D10 U1.D11 U1.D12 U1.D13 U1.D14 U1.D15 U1.D16 U1.D17 U1.D18 U1.D20 U1.D21 U1.D22 U1.E1 U1.E2 U1.E3 U1.E4 U1.E6 U1.E7 U1.E8 U1.E9 U1.E10 U1.E11 U1.E12 U1.E13 U1.E14 U1.E15 U1.E16 U1.E17 U1.E20 U1.E21 U1.E22 U1.F1 U1.F2 U1.F3 U1.F4 U1.F5 U1.F9 U1.F10 U1.F11 U1.F12 U1.F13 U1.F14 U1.F15 U1.F18 U1.F19 U1.F21 U1.G1 U1.G2 U1.G3 U1.G5 U1.G18 U1.G19 U1.G20 U1.G21 U1.G22 U1.H1 U1.H2 U1.H3 U1.H4 U1.H5 U1.H6 U1.H18 U1.H19 U1.H20 U1.H21 U1.H22 U1.J1 U1.J2 U1.J3 U1.J4 U1.J5 U1.J6 U1.J18 U1.J19 U1.J21 U1.K1 U1.K2 U1.K4 U1.K5 U1.K6 U1.K18 U1.K19 U1.K20 U1.K21 U1.K22 U1.L1 U1.L2 U1.L3 U1.L4 U1.L5 U1.L6 U1.L18 U1.L21 U1.L22 U1.M1 U1.M2 U1.M3 U1.M4 U1.M6 U1.M18 U1.M19 U1.M20 U1.M21 U1.M22 U1.N1 U1.N2 U1.N3 U1.N4 U1.N5 U1.N6 U1.N18 U1.N19 U1.N20 U1.N21 U1.N22 U1.P1 U1.P2 U1.P4 U1.P6 U1.P18 U1.P19 U1.P21 U1.R1 U1.R2 U1.R3 U1.R4 U1.R5 U1.R6 U1.R18 U1.R19 U1.R20 U1.R21 U1.R22 U1.T1 U1.T2 U1.T3 U1.T4 U1.T5 U1.T6 U1.T18 U1.T20 U1.T21 U1.T22 U1.U1 U1.U2 U1.U3 U1.U4 U1.U5 U1.U6 U1.U8 U1.U9 U1.U10 U1.U11 U1.U18 U1.U19 U1.U21 U1.V1 U1.V2 U1.V3 U1.V4 U1.V6 U1.V7 U1.V8 U1.V9 U1.V10 U1.V11 U1.V12 U1.V13 U1.V14 U1.V15 U1.V20 U1.V21 U1.V22 U1.W1 U1.W2 U1.W3 U1.W4 U1.W5 U1.W6 U1.W7 U1.W8 U1.W9 U1.W10 U1.W11 U1.W12 U1.W13 U1.W14 U1.W15 U1.W16 U1.W20 U1.W21 U1.W22 U1.Y1 U1.Y2 U1.Y4 U1.Y5 U1.Y6 U1.Y8 U1.Y9 U1.Y11 U1.Y12 U1.Y16 U1.Y17 U1.Y21 U1.Y22 U3.J1 U3.J9 U3.L1 U3.L9 U3.M7 U4.J1 U4.J9 U4.L1 U4.L9 U4.M7 U?.1 U?.2 U?.3 U?.4 U?.5 U?.6 U?.7 U?.8 U?.9 U?.10 U?.11 U?.12 U?.13 U?.14 U?.15 U?.16 U?.17 U?.18 U?.19 U?.20 U?.21 U?.22 U?.23 U?.24 U?.25 U?.26 U?.27 U?.28 U?.29 U?.30 U?.31 U?.32 U?.33 U?.34 U?.35 U?.36 U?.37 U?.38 U?.39 U?.40 U?.41 U?.A8 U?.A9 U?.A10 U?.A11 U?.A12 U?.A13 U?.A14 U?.B1 U?.B7 U?.B8 U?.B9 U?.B10 U?.B11 U?.B12 U?.B13 U?.B14 U?.C5 U?.C7 U?.C8 U?.C9 U?.C10 U?.C11 U?.C12 U?.C13 U?.C14 U?.D3 U?.D4 U?.D12 U?.D13 U?.D14 U?.E1 U?.E2 U?.E3 U?.E5 U?.E8 U?.E9 U?.E10 U?.E12 U?.E13 U?.E14 U?.F1 U?.F2 U?.F3 U?.F10 U?.F12 U?.F13 U?.F14 U?.G1 U?.G2 U?.G3 U?.G10 U?.G12 U?.G13 U?.G14 U?.H1 U?.H2 U?.H3 U?.H5 U?.H12 U?.H13 U?.H14 U?.J1 U?.J2 U?.J3 U?.J5 U?.J12 U?.J13 U?.J14 U?.K6 U?.K7 U?.K10 U?.K12 U?.K13 U?.K14 U?.L1 U?.L2 U?.L3 U?.L12 U?.L13 U?.L14 U?.M1 U?.M2 U?.M3 U?.M7 U?.M8 U?.M9 U?.M10 U?.M11 U?.M12 U?.M13 U?.M14 U?.N3 U?.N8 U?.N9 U?.N10 U?.N11 U?.N12 U?.N13 U?.N14 U?.P1 U?.P2 U?.P9 U?.P10 U?.P11 U?.P12 U?.P13 U?.P14

## Silkscreen, mask and mechanical layers (free items; w line width, h text height)
Mechanical 1:
  the board outline again, w5

## Text inside footprints (layer, text, board x,y; h text height)
U?: Mechanical 13 "40" at 1842.49,500.44 h19.68 r90; Mechanical 13 "31" at 1842.49,640.2 h19.68 r90; Mechanical 13 "30" at 1861.19,655.95 h19.68 r90; Mechanical 13 "21" at 2002.92,657.92 h19.68 r90; Mechanical 13 "20" at 2022.61,639.21 h19.68 r90; Mechanical 13 "11" at 2022.61,499.45 h19.68 r90; Mechanical 13 "10" at 2002.92,480.75 h19.68 r90; Mechanical 13 "1" at 1861.19,484.69 h19.68 r90; Mechanical 13 "41" at 1932.06,568.35 h19.68 r90